# Altium PCB FEU-102-1_part4.PcbDoc
Units mm, origin at the board's own origin, x right, y up, seen from the top; angles counter-clockwise.
Board outline 20 x 20 mm, 2 copper layers (Top Layer, Bottom Layer), stack 1.021 mm thick; 12 components, 20 nets, 30 pads, 9 vias.
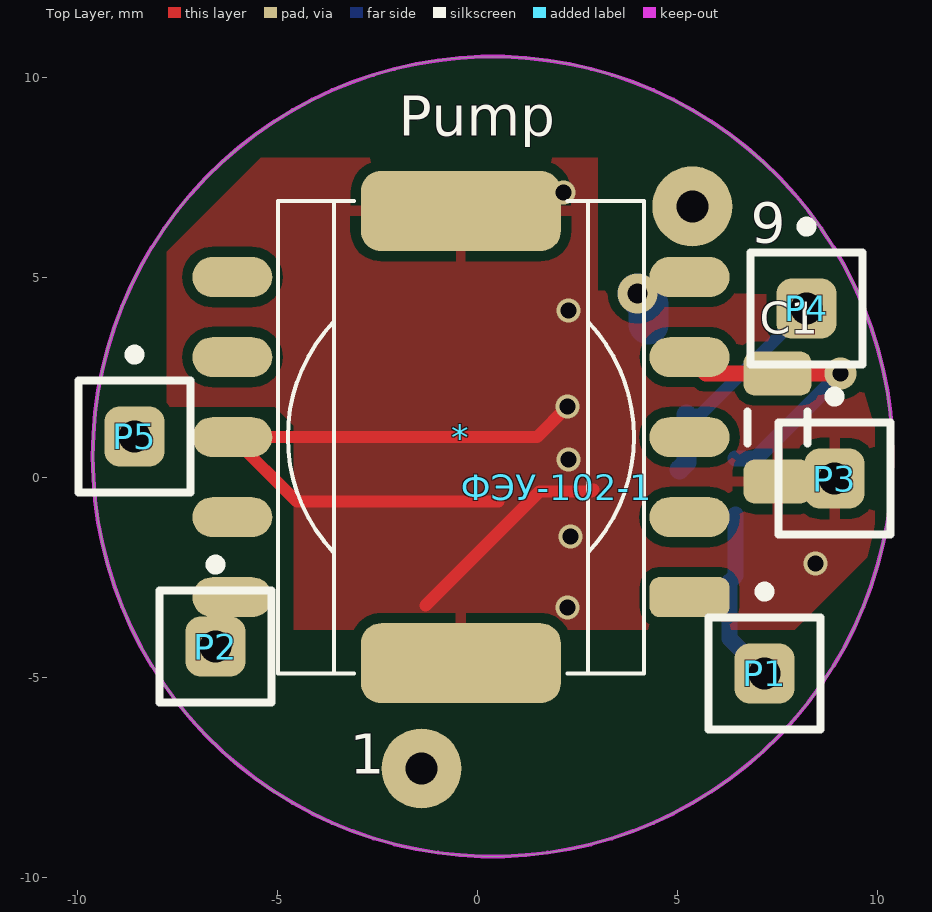
[diagram p0: Top Layer view]
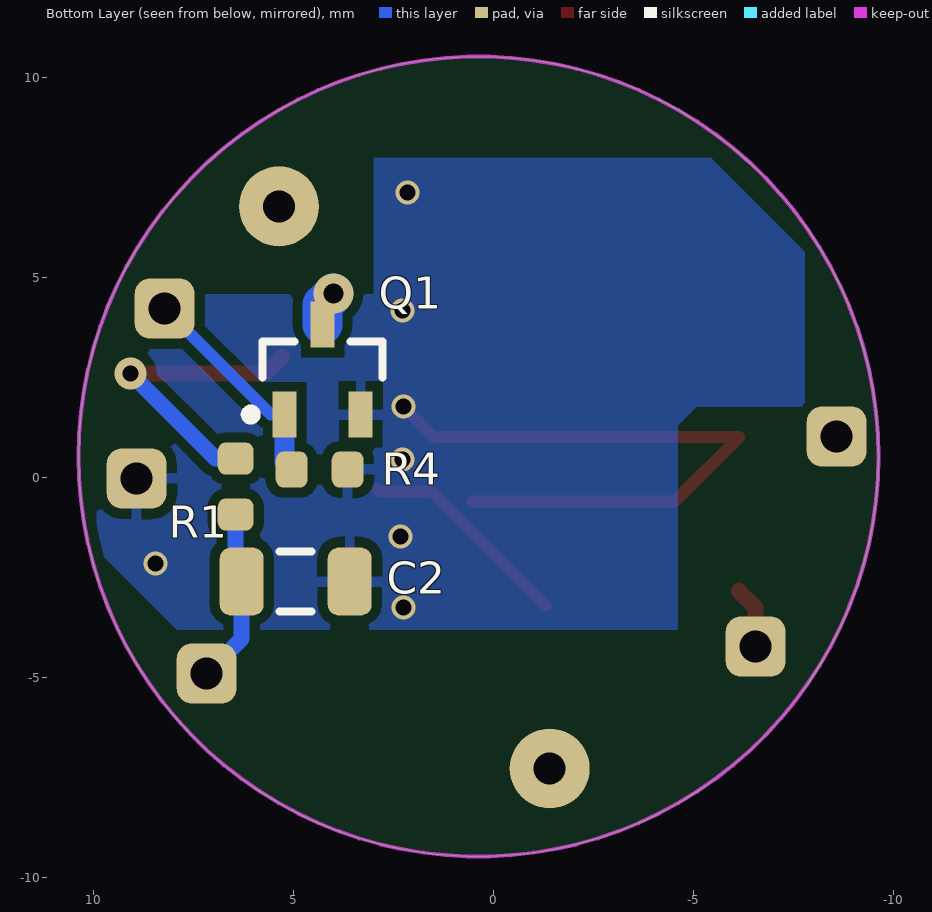
[diagram p1: Bottom Layer view, seen from below]
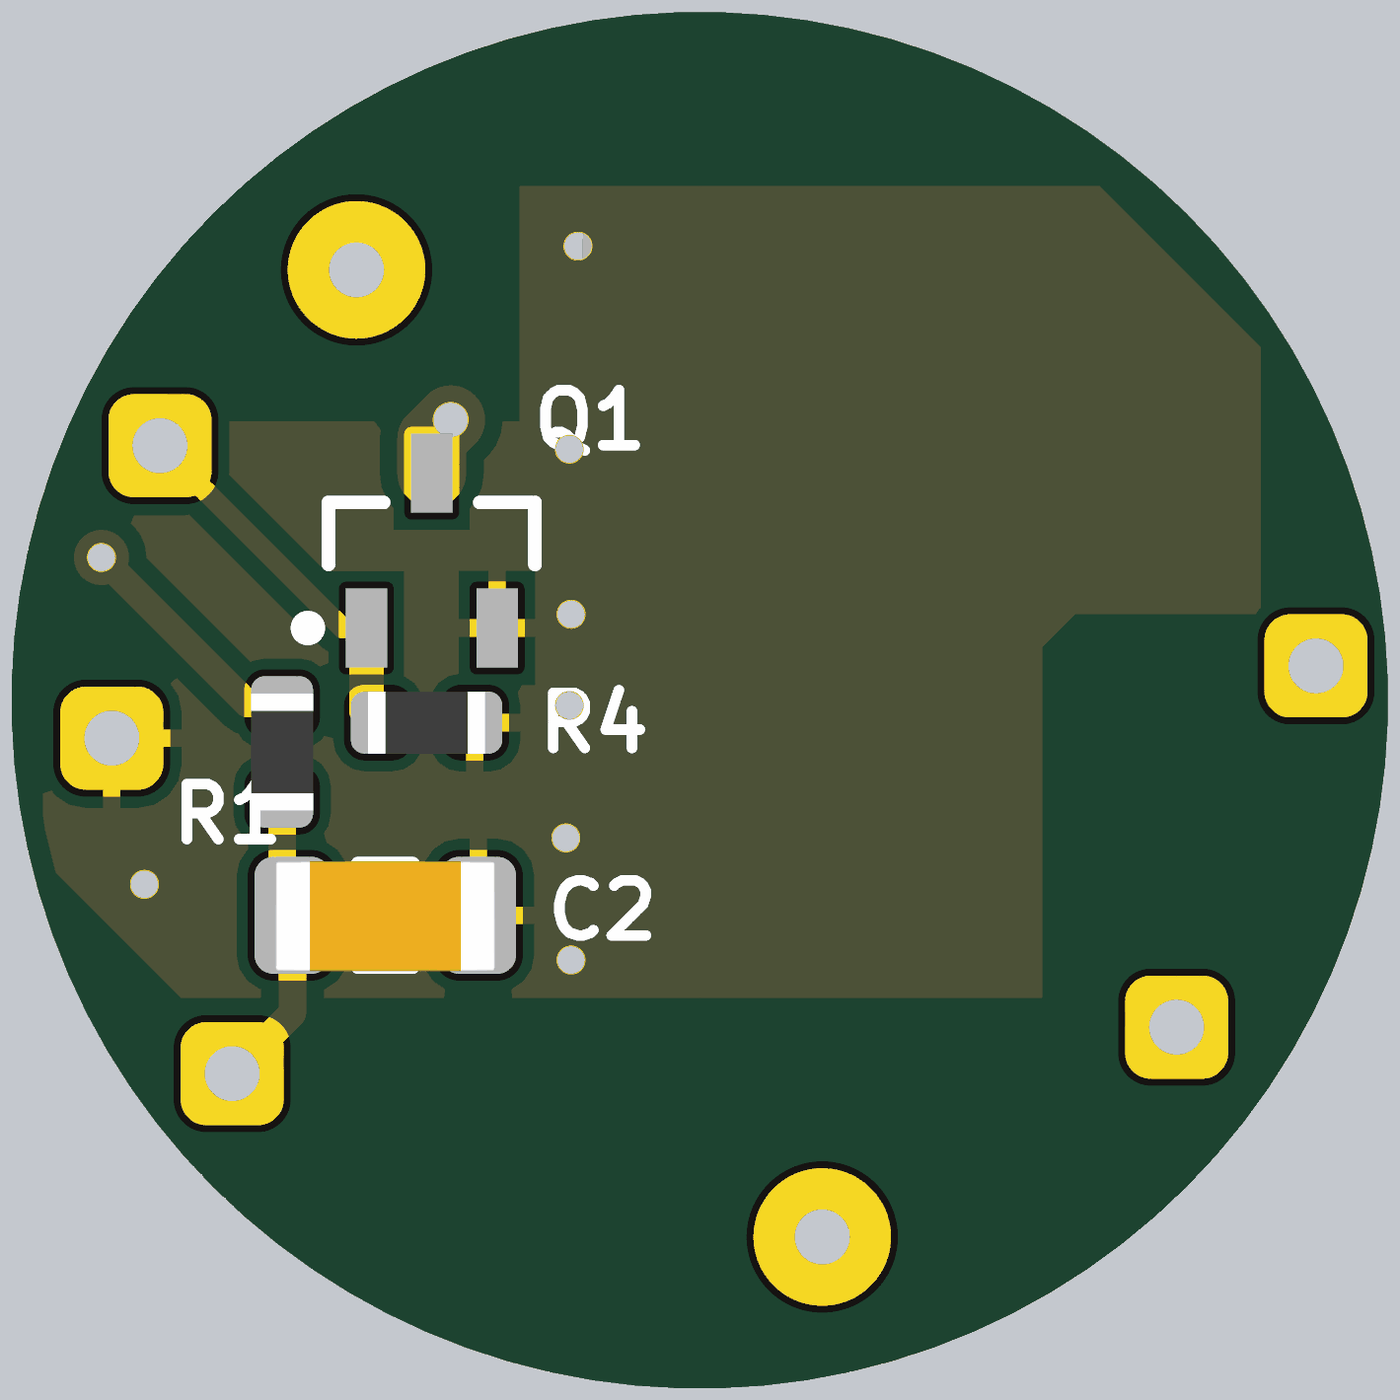
[diagram p2: 3D render of the assembled board from below, using the file's embedded part models]

## Layer stack, top to bottom
Top Solder: solder mask 0.0102, Solder Resist, Dk 3.5
Top Layer: signal copper 0.0356
Dielectric1: dielectric 0.95, FR-4, Dk 4.8
Bottom Layer: signal copper 0.0356
Bottom Solder: solder mask 0.0102, Solder Resist, Dk 3.5

## Board outline
-9.62,0.526 ccw(c0.38,0.526) 0.38,-9.474 ccw(c0.38,0.526) 10.38,0.526 ccw(c0.38,0.526) 0.38,10.526 ccw(c0.38,0.526)

## Design rules (kind name [scope] priority, off if disabled: settings)
Clearance [All] p1: gap=0.25
ComponentClearance [All] p1: gap=0.1 collisioncheckmode=3 verticalgap=0.254 showdistances=TRUE
HoleSize [All] p1: absolutevalues=TRUE maxlimit=2.54 minlimit=0.3 maxpercent=80.000 minpercent=20.000
HoleToHoleClearance [All] p1: gap=0.152 allowstackedmicrovias=TRUE
MinimumAnnularRing [All] p1: minimumring=0.2
MinimumSolderMaskSliver [All] p1: minsoldermaskwidth=0.152
PlaneClearance [All] p1: clearance=2
PlaneConnect [All] p1: planeconnectstyle=Relief reliefexpansion=0.457 reliefentries=4 reliefconductorwidth=0.3 reliefairgap=0.457
PolygonConnect PolygonConnect_via [IsVia] p1: connectstyle=Direct reliefconductorwidth=0.254 reliefentries=4 polygonreliefangle="90 Angle" airgapwidth=0.254
PolygonConnect [All] p2: connectstyle=Relief reliefconductorwidth=0.254 reliefentries=4 polygonreliefangle="90 Angle" airgapwidth=0.254
RoutingVias [All] p1: holewidth=0.3 width=0.62 viastyle="Through Hole" minholewidth=0.3 minwidth=0.62 maxholewidth=6 maxwidth=4
SilkToSilkClearance [All] p1: silktosilkclearance=0.152
SilkToSolderMaskClearance SilkscreenOverComponentPads [IsPad] p1: minsilkscreentomaskgap=0.1 clearancetoexposedcopper=TRUE
SolderMaskExpansion [All] p1: expansion=0.1
Width [All] p1: maxlimit=2.254 minlimit=0.3 preferedwidth=0.4
22 further rules are at their usual default settings.

## Components (designator, comment, footprint, x,y, rotation, side; value= is the part's Value field where it differs from the comment)
* "FerroxCube ER11" "FerroxCube ER11" -0.325,1.15 r90 top
C1 "4.7uF" C1206 7.5,1.25 r270 top
C2 "4.7uF" C1206 4.95,-2.6 r180 bottom
P1 "Plug" PIN1 7.175,-4.9 r0 top
P2 "Plug" PIN1 -6.55,-4.225 r0 top
P3 "Plug" PIN1 8.925,-0.025 r0 top
P4 "Plug" PIN1 8.225,4.225 r0 top
P5 "Plug" PIN1 -8.575,1.025 r0 top
Q1 "IRLML6344" SOT-23_N 4.275,2.7 r90 bottom
R1 "12R" 1608[0603]_RES 6.45,-0.225 r270 bottom
R4 "47k" 1608[0603]_RES 4.35,0.2 r0 bottom
ФЭУ-102-1 "Header 7X2" ФЭУ-102 0.38,0.526 r0 top locked

## Footprints (in the part's own frame and the unit in brackets; to place one, negate y for a bottom-side part, rotate by r counter-clockwise, add the part's x,y. Pads: shape width x height; smd on the part's side, far side on the other; paste and mask are expansions set on the pad)
1608[0603]_RES [mm] "Chip Capacitor, Body 1.6x0.8mm, IPC High Density"
  rrect50% 0.8x0.9 smd: 1(-0.7,0) 2(0.7,0)
  body extent -0.85,-0.45 0.85,0.45, height 0.45
C1206 [mm] "Chip Capacitor, Body 3.2x1.6mm, IPC High Density"
  rrect50% 1.1x1.7 smd: 1(-1.35,0) 2(1.35,0)
  silkscreen extent -0.4,-0.75 0.4,0.75, body extent -1.6,-0.81 1.6,0.79, height 1.6
"FerroxCube ER11" [mm]
  rrect50% 1x2 smd: 1(-4.139,-5.624)
  oval 1x2 smd: 2(-2.139,-5.624) 3(-0.139,-5.624) 4(1.862,-5.624) 5(3.862,-5.624) 6(3.862,5.806) 7(1.862,5.806) 8(-0.139,5.806) 9(-2.139,5.806) 10(-4.139,5.806)
  rrect50% 2x5 smd: GND(-5.79,0.091) GND(5.513,0.091)
  silkscreen extent -6.04,-4.48 5.77,4.66
PIN1 [mm] "Connector; Plug"
  rrect50% 1.5x1.5 hole 0.8: 1(0,0)
  silkscreen extent -1.4,-1.4 1.4,2.17
SOT-23_N [mm] "SOT23, 3-Leads, Body 2.9x1.3mm, Pitch 0.95mm, Lead Span 2.3mm, IPC Medium Density"
  rect 1.15x0.6 smd: 1(-1.125,0.95) 2(-1.125,-0.95) 3(1.125,0)
  silkscreen extent -1.25,-1.5 0.7,1.93, body extent -0.7,-1.5 0.7,1.5, height 1.11
ФЭУ-102 [mm]
  round 2 hole 0.8: 1(-1.78,-7.799) 9(4.988,6.255)
  Keep-Out Layer circle w0.1: c0,0 r10

## Part data
C1 C2: library part "Cap Semi", "Capacitor (Semiconductor SIM Model)"
Q1: library part IRLML2402, "HEXFET Power MOSFET"
R1 R4: library part "Resistor 0805"
ФЭУ-102-1: "Header, 7-Pin, Dual row"

## Via types
v1: diameter 0.6, hole 0.4, Top Layer to Bottom Layer, tented both sides, 7 vias
v2: diameter 0.8, hole 0.4, Top Layer to Bottom Layer, tented both sides, 1 vias
v3: diameter 1, hole 0.5, Top Layer to Bottom Layer, tented both sides, 1 vias

## Nets (pads, with @x,y where several pads share a name; then routed paths per layer and width w, separated by ;. In a path a pad name is that pad's centre, name@x,y a point inside that pad or via, vN(x,y) a via of type N, cw(c..) or ccw(c..) an arc to the next point about the centre after c; other vN are vias at no path point)
ANODE: ФЭУ-102-1.9
DINODE1: 
DINODE2: 
DINODE3: 
DINODE4: 
DINODE5: 
DINODE6: 
DINODE7: 
DINODE8: 
DINODE9: 
DINODE10: 
DINODE11: 
DINODE12: 
FOTOKAT: ФЭУ-102-1.1
GND: *.8 *.GND C1.2 C2.2 P3.1 Q1.2 R4.1 | length 21.4
  Top Layer w0.3: -1.3,-3.2 1.55,-0.35 2.85,-0.35 2.9,-0.3 ; 0.525,-0.6 -4.519,-0.6 *.8 1.486,1.011 v1(2.25,1.775)
  other v1: 2.25,-3.25 8.45,-2.15 2.325,-1.475 2.275,0.45 2.275,4.175 2.15,7.125
Net*_4: *.4 C1.1 R1.1 | length 7.5
  Top Layer w0.4: *.4 5.711,2.6 C1.1 v2(9.075,2.6)
  Bottom Layer w0.4: R1.1 6.95,0.475 v2(9.075,2.6)
Net*_5: *.5 Q1.3 | length 0.9
  Bottom Layer w1: v3(4,4.6) 4.275,4.325 Q1.3
PULSE: P4.1 Q1.1 R4.2 | length 5.5
  Bottom Layer w0.3: Q1.1 5.575,1.575 P4.1
  Bottom Layer w0.5: R4.2 5.225,0.375 Q1.1
PUMP: *.10 P2.1 | length 2
  Top Layer w0.4: P2.1@-6.8,-3.975 P2.1 -6.55,-3.258 *.10@-6.131,-2.839
  Bottom Layer w0.4: P2.1 P2.1@-6.5,-4.275
VCC: C2.1 P1.1 R1.2 | length 4.4
  Bottom Layer w0.4: R1.2 6.45,-2.45 C2.1 6.3,-4.025 P1.1
pads on no net: *.1 *.2 *.3 *.6 *.7 *.9 P5.1

## Polygon pours and split planes (outlines as drawn)
GND on Top Layer "Bottom Layer-No Net" (solid, pour order 2): -5.425,8 -7.775,5.65 -7.775,1.775 -5.075,1.775 -5,1.7 -4.6,1.3 -4.6,-3.8 7.925,-3.8 9.5,-2.225 9.925,-1.8 9.925,1.25 8.95,4.55 3,4.675 3,3.7 3,8
GND on Bottom Layer "Bottom Layer-No Net" (solid, pour order 0): -5.425,8 -7.775,5.65 -7.775,1.775 -5.075,1.775 -5,1.7 -4.6,1.3 -4.6,-3.8 7.925,-3.8 9.5,-2.225 9.925,-1.8 9.925,1.25 8.967,4.579 3,4.579 3,3.7 3,8

## Silkscreen, mask and mechanical layers (free items; w line width, h text height)
Top Overlay:
  text "Pump" at -1.975,8.55 h1
  text "9" at 6.825,5.875 h1
  text "1" at -3.2,-7.4 h1